# EAGLE board Board (EAGLE 9.6.2)
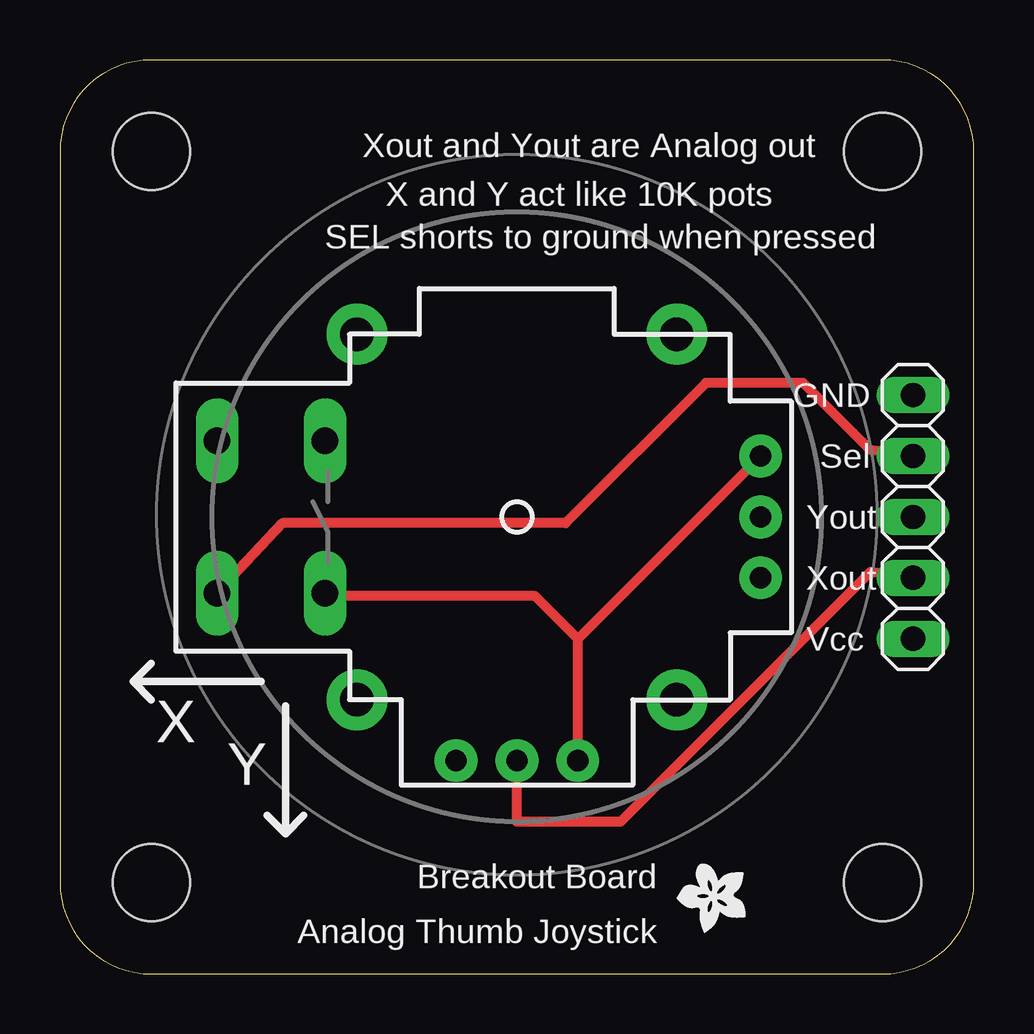
[diagram p0: board, top side]
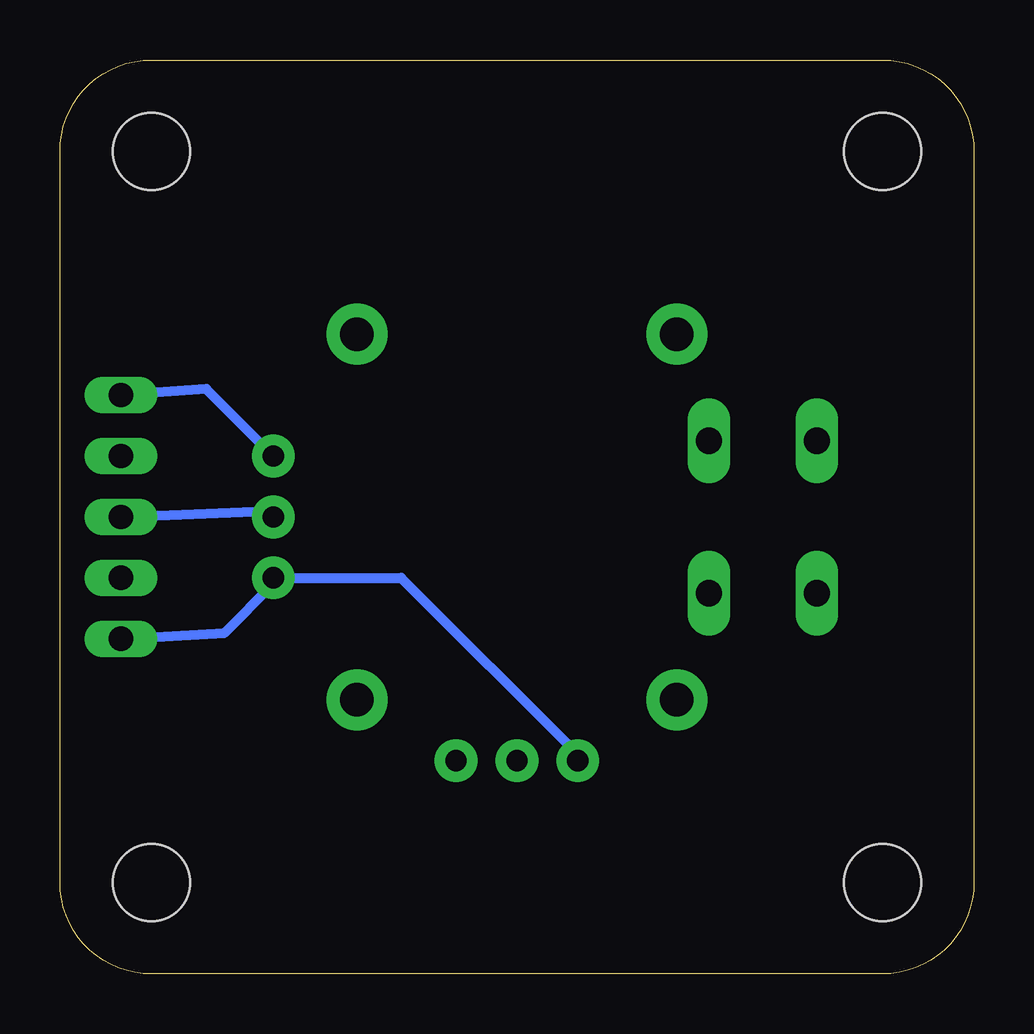
[diagram p1: board, bottom side, seen from below]

Size 38.1 x 38.1 mm. Coordinates in mm from the lower left corner, seen from the top.
Outline: 38.1,34.29 arc90 34.29,38.1 3.81,38.1 arc90 0,34.29 0,3.81 arc90 3.81,0 34.29,0 arc90 38.1,3.81 38.1,34.29
Copper layers (1*16): Top 0.035mm / dielectric 1.5mm / Bottom 0.035mm
Design rules "default": minimum track width 6mil, minimum drill 0.35mm, track to track 6mil, track to pad 6mil, pad to pad 6mil, via to via 6mil, smd to smd 6mil, copper to edge 40mil, drill to drill 6mil, minimum pad ring 10mil, minimum via ring 8mil, stop-mask expansion 4mil, vias tented up to drill 0mil, thermal gap 10mil
Holes 3.2 mm at 34.29,3.81 3.81,3.81 3.81,34.29 34.29,34.29

## Footprints (pad centres in the part's own frame; a part is rotated, then mirrored left to right if it is on the bottom)
XTAL_PS1240P02BT_TDK = drill 0.914 pad 1.422 square: 1 0,0 | drill 0.914 pad 1.422: 2 5.004,0
QFN56_ESP32-S2FH4_EXP = smd 0.762 x 0.203: 1 -3.454,2.6; 2 -3.454,2.2; 3 -3.454,1.8; 4 -3.454,1.4; 5 -3.454,1; 6 -3.454,0.6; 7 -3.454,0.2; 8 -3.454,-0.2; 9 -3.454,-0.6; 10 -3.454,-1; 11 -3.454,-1.4; 12 -3.454,-1.8; 13 -3.454,-2.2; 14 -3.454,-2.6; 29 3.454,-2.6; 30 3.454,-2.2; 31 3.454,-1.8; 32 3.454,-1.4; 33 3.454,-1; 34 3.454,-0.6; 35 3.454,-0.2; 36 3.454,0.2; 37 3.454,0.6; 38 3.454,1; 39 3.454,1.4; 40 3.454,1.8; 41 3.454,2.2; 42 3.454,2.6 | smd 0.203 x 0.762: 15 -2.6,-3.454; 16 -2.2,-3.454; 17 -1.8,-3.454; 18 -1.4,-3.454; 19 -1,-3.454; 20 -0.6,-3.454; 21 -0.2,-3.454; 22 0.2,-3.454; 23 0.6,-3.454; 24 1,-3.454; 25 1.4,-3.454; 26 1.8,-3.454; 27 2.2,-3.454; 28 2.6,-3.454; 43 2.6,3.454; 44 2.2,3.454; 45 1.8,3.454; 46 1.4,3.454; 47 1,3.454; 48 0.6,3.454; 49 0.2,3.454; 50 -0.2,3.454; 51 -0.6,3.454; 52 -1,3.454; 53 -1.4,3.454; 54 -1.8,3.454; 55 -2.2,3.454; 56 -2.6,3.454 | smd 4.039 x 4.039: 57 0,0
1X05 = drill 1.016 long: 1 -5.08,0; 2 -2.54,0; 3 0,0; 4 2.54,0; 5 5.08,0
JOYSTICK = drill 1.1 pad 1.778 long: B1A -3.175,12.501; B1B 3.175,12.501; B2A -3.175,8.001; B2B 3.175,8.001 | drill 0.889 pad 1.778: H1 -2.54,-10.16; H2 0,-10.16; H3 2.54,-10.16; V1 -10.16,2.54; V2 -10.16,0; V3 -10.16,-2.54 | drill 1.397 pad 2.54: MOUNT1 -7.62,6.668; MOUNT2 -7.62,-6.668; MOUNT3 7.62,-6.668; MOUNT4 7.62,6.668

## Placement (x,y rotation side)
E$1  [XTAL_PS1240P02BT_TDK]  -41.91,57.15 0 top  (outside the outline)
E$2  [QFN56_ESP32-S2FH4_EXP]  12.7,76.2 0 top  (outside the outline)
JP1  [1X05]  35.56,19.05 270 top
U1  JOYSTICKPTH  [JOYSTICK]  19.05,19.05 90 top
U$1  [ADAFRUIT200MIL]  27.18,3.05 90 top

## Library data of the parts
E$1 E$2 = library
JP1 = pinhead
U1 U$1 = adafruit

## Nets
N$1: JP1.5 U1.H1 U1.V1
N$2: JP1.1 U1.B2A U1.H3 U1.V3
N$3: JP1.4 U1.V2
N$4: JP1.3 U1.H2
N$5: JP1.2 U1.B1A

## Tracks (layer width: path | path; a pad name or v marks a point on that pad's centre or on a via)
N$1
  Bottom 0.406: JP1.5 31.24,14.22 29.21,16.26 U1.H1 23.88,16.51 16.51,9.14 U1.V1
N$2
  Top 0.406: U1.B2A 11.43,15.75 19.81,15.75 21.59,13.97 | U1.V3 21.59,13.97 | 21.59,13.97 U1.H3
  Bottom 0.406: JP1.1 32,24.38 U1.H3
N$3
  Top 0.406: JP1.4 33.78,16.76 23.37,6.35 19.05,6.35 U1.V2
N$4
  Bottom 0.406: JP1.3 29.46,19.3 U1.H2
N$5
  Top 0.406: U1.B1A 9.27,18.8 21.08,18.8 26.92,24.64 30.99,24.64 33.78,21.84 JP1.2

## Text on the board
tPlace: Xout and Yout are Analog out | X and Y act like 10K pots | SEL shorts to ground when pressed | GND | Sel | Yout | Xout | Vcc | X | Y | Breakout Board | Analog Thumb Joystick